# EAGLE board power (EAGLE 9.6.2)
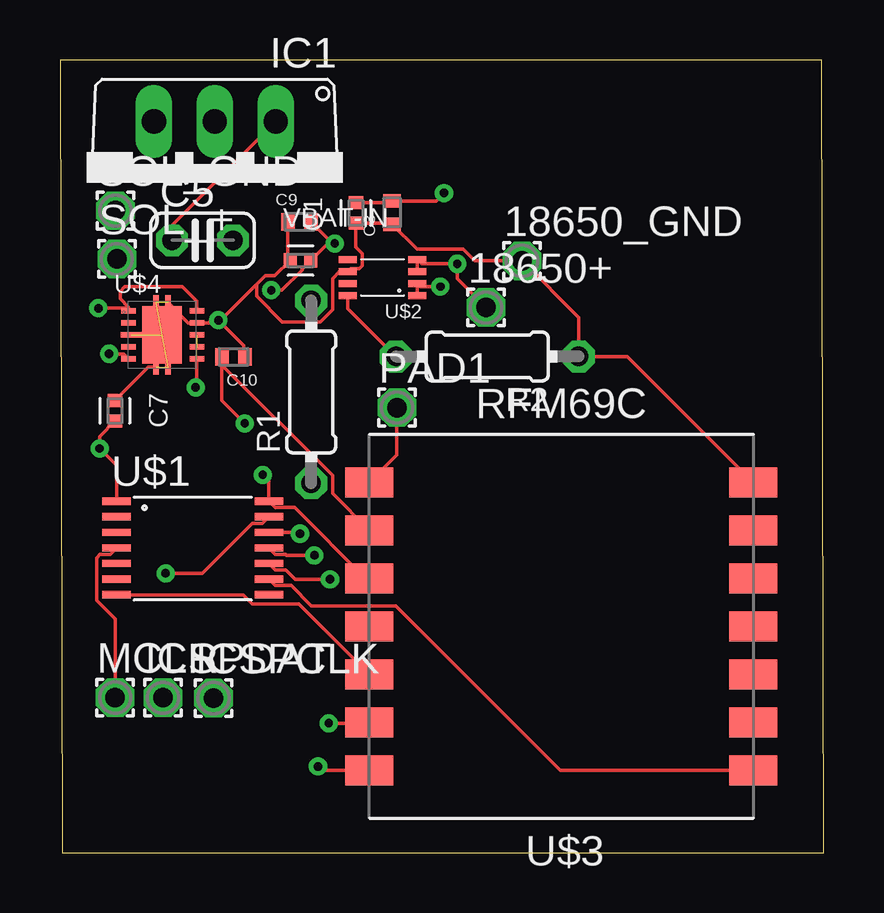
[diagram p0: board, top side]
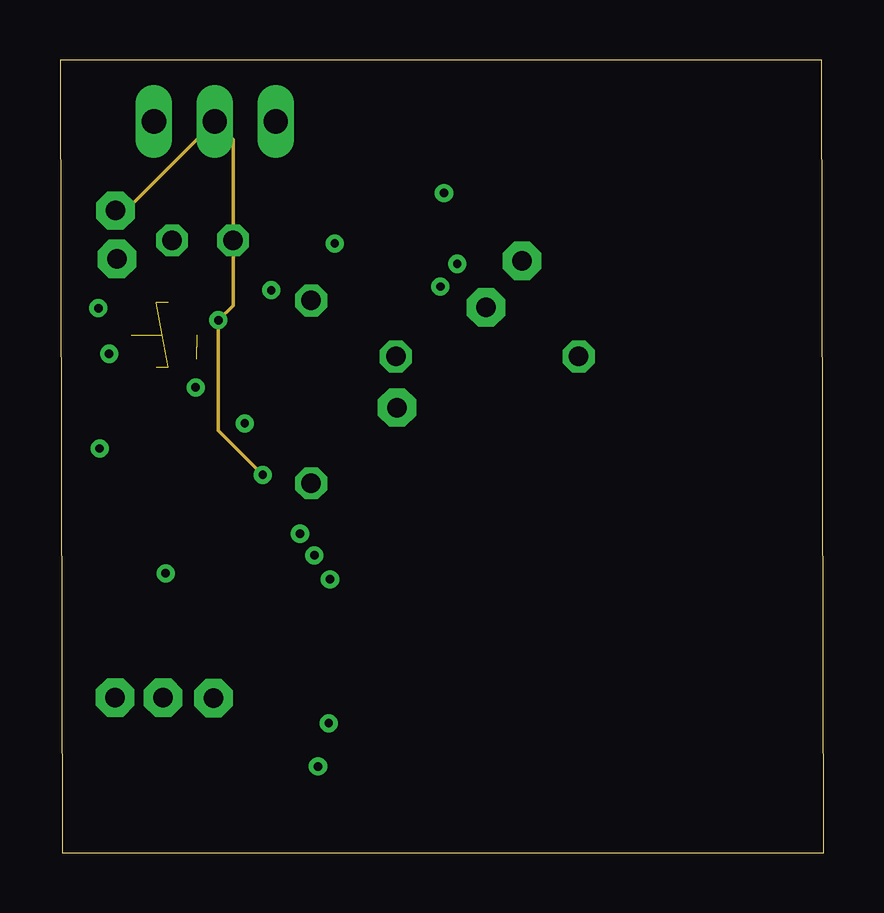
[diagram p1: board, inner layer GND]
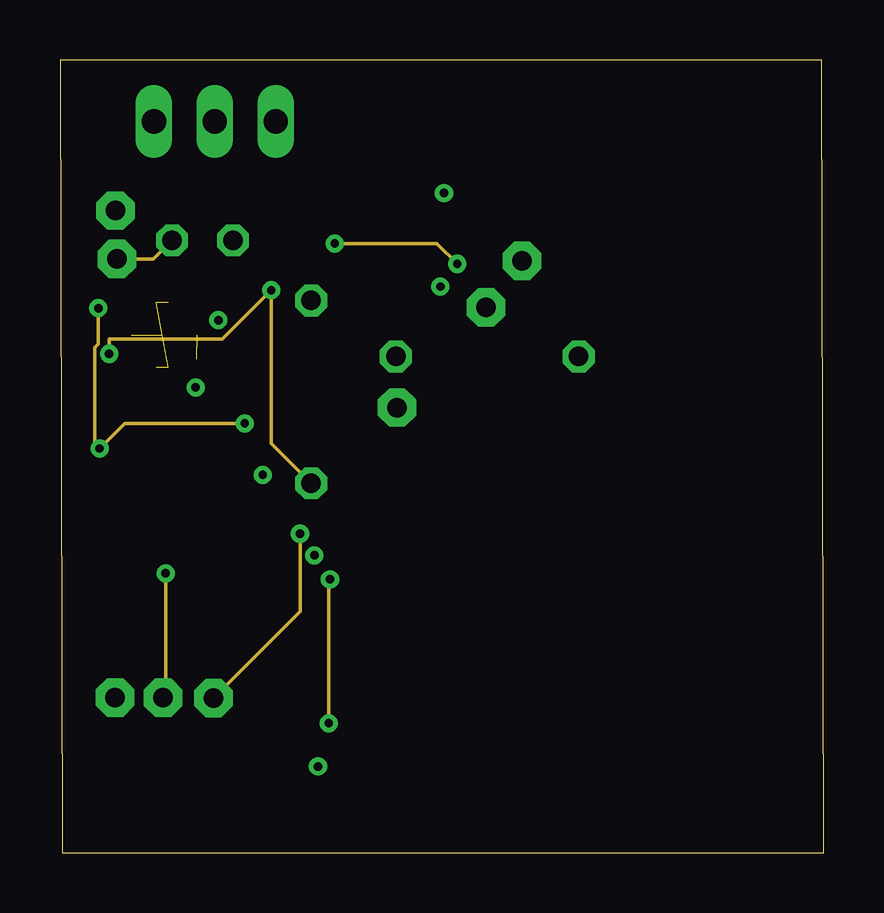
[diagram p2: board, inner layer Route3]
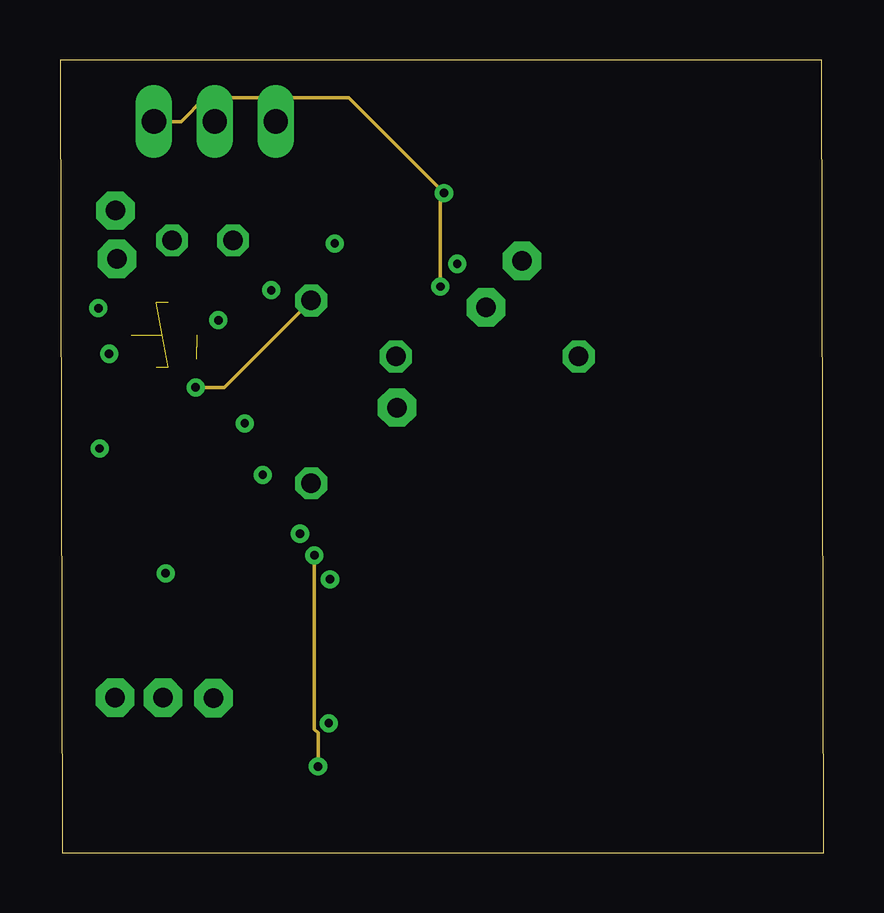
[diagram p3: board, inner layer Route4]

Size 31.83 x 33.05 mm. Coordinates in mm from the lower left corner, seen from the top.
Outline: 0.1,0 31.83,0 31.73,33.05 0,33.05 0.1,0
Copper layers (1*2*3*4): Top 0.035mm / dielectric 1.5mm / GND 0.035mm / dielectric 0.15mm / Route3 0.035mm / dielectric 0.2mm / Route4 0.035mm
Design rules "default *": minimum track width 6mil, minimum drill 0.35mm, track to track 6mil, track to pad 6mil, pad to pad 6mil, via to via 6mil, smd to smd 6mil, copper to edge 40mil, drill to drill 6mil, minimum pad ring 10mil, minimum via ring 8mil, stop-mask expansion 4mil, vias tented up to drill 0mil, thermal gap 10mil

## Footprints (pad centres in the part's own frame; a part is rotated, then mirrored left to right if it is on the bottom)
1,6/0,8 = drill 0.813 pad 1.6 octagon: 1 0,0
CAPC1005X55N = smd 0.54 x 0.6: 1 -0.43,0; 2 0.43,0
CAPC1005X70N = smd 0.56 x 0.73: 1 -0.485,0; 2 0.485,0
C025-024X044 = drill 0.813 octagon: 1 -1.27,0; 2 1.27,0
TO220V = drill 1.016 long: 1 -2.54,-2.54; 2 0,-2.54; 3 2.54,-2.54
0204/7 = drill 0.813 octagon: 1 -3.81,0; 2 3.81,0
PIC16F(L)1615-TSSOP = smd 1.2 x 0.3: 1 -3.175,1.975; 2 -3.175,1.325; 3 -3.175,0.675; 4 -3.175,0.025; 5 -3.175,-0.625; 6 -3.175,-1.275; 7 -3.175,-1.925; 8 3.175,-1.925; 9 3.175,-1.275; 10 3.175,-0.625; 11 3.175,0.025; 12 3.175,0.675; 13 3.175,1.325; 14 3.175,1.975
MCP73831-DFN = smd 0.3 x 0.75: 1 -0.75,-1.45; 2 -0.25,-1.45; 3 0.25,-1.45; 4 0.75,-1.45; 5 0.75,1.45; 6 0.25,1.45; 7 -0.25,1.45; 8 -0.75,1.45
RFM69C = smd 2 x 1.25: 1 8,-6; 2 8,-4; 3 8,-2; 4 8,0; 5 8,2; 6 8,4; 7 8,6; 8 -8,6; 9 -8,4; 10 -8,2; 11 -8,0; 12 -8,-2; 13 -8,-4; 14 -8,-6
TPS63001-VSON = smd 0.6 x 0.24: 1 -1.4,1; 2 -1.4,0.5; 4 -1.4,-0.5; 5 -1.4,-1; 6 1.45,-1; 7 1.45,-0.5; 8 1.45,0; 9 1.45,0.5; 10 1.45,1 | smd 0.889 x 0.24: 3 -1.273,0 | smd 1.65 x 2.4: 11 0,0 | smd 0.24 x 0.6: 11@1 -0.25,1.35; 11@2 0.25,1.35; 11@3 -0.25,-1.35; 11@4 0.25,-1.35

## Placement (x,y rotation side)
18650+  [1,6/0,8]  17.75,22.73 0 top
18650_GND  [1,6/0,8]  19.25,24.68 0 top
C1  .1uf  [CAPC1005X55N]  12.33,26.68 90 top
C3  1uf  [CAPC1005X70N]  13.83,26.69 90 top
C5  .33uf  [C025-024X044]  5.94,25.53 0 top
C7  .1uf  [CAPC1005X55N]  2.29,18.42 270 top
C9  1uf  [CAPC1005X70N]  9.98,26.29 0 top
C10  1uf  [CAPC1005X70N]  7.23,20.67 180 top
IC1  7805TV  [TO220V]  6.45,27.94 180 top
ICSPCLK  [1,6/0,8]  6.39,6.44 0 top
ICSPDAT  [1,6/0,8]  4.29,6.46 0 top
MCLR  [1,6/0,8]  2.3,6.47 0 top
PAD1  [1,6/0,8]  14.04,18.56 0 top
R1  100R  [0204/7]  10.47,19.21 90 top
R2  2kR  [0204/7]  17.8,20.69 180 top
SOL_+  [1,6/0,8]  2.37,24.75 0 top
SOL_GND  [1,6/0,8]  2.31,26.77 0 top
U$1  PIC16F1615-TSSOP  [PIC16F(L)1615-TSSOP]  5.53,12.68 0 top
U$2  MCP73831  [MCP73831-DFN]  13.44,23.98 90 top
U$3  RFM69C  [RFM69C]  20.89,9.44 180 top
U$4  TPS63001-VSON  [TPS63001-VSON]  4.25,21.59 0 top
VBAT-IN  .1uf  [CAPC1005X55N]  10.02,24.69 0 top

## Library data of the parts
18650+ 18650_GND ICSPCLK ICSPDAT MCLR PAD1 SOL_+ SOL_GND = wirepad
C1 C7 VBAT-IN = EMF105B7104MVHF; AVAILABILITY: Unavailable; DESCRIPTION: 0.1µF ±20% 16V Ceramic Capacitor X7R 0402 (1005 Metric); MF: Taiyo Yuden; MP: EMF105B7104MVHF; PACKAGE: 1005 Taiyo Yuden; PRICE: None
C3 C9 C10 = UMK105CBJ105KV-F; AVAILABILITY: Unavailable; DESCRIPTION: 1µF ±10% 50V Ceramic Capacitor X5R 0402 (1005 Metric); MF: Taiyo Yuden; MP: UMK105CBJ105KV-F; PACKAGE: 1005 Taiyo Yuden; PRICE: None
C5 = rcl; SPICEPREFIX: C
IC1 = linear
R1 R2 = rcl; SPICEPREFIX: R
U$1 = PIC16F(L)1615
U$2 = MCP73831
U$3 = RFM69C
U$4 = TPS63001

## Nets
GND: 18650_GND.1 C1.1 C3.1 C5.2 C7.1 C9.1 C10.1 IC1.2 R2.1 SOL_GND.1 U$1.14 U$2.6 U$3.3 U$3.14 U$4.3 U$4.9 U$4.11 U$4.11@1 U$4.11@2 U$4.11@3 U$4.11@4 VBAT-IN.1
MISO: U$1.9 U$3.8
MOSI: U$1.7 U$3.5
N$1: C5.1 IC1.1 SOL_+.1
N$2: R1.2 U$4.6 U$4.7 U$4.8
N$4: PAD1.1 U$3.1
N$5: R2.2 U$2.8
N$12: ICSPCLK.1 U$1.12
N$13: ICSPDAT.1 U$1.13
N$14: MCLR.1 U$1.4
SCK: U$1.10 U$3.6
SS: U$1.11 U$3.7
VBAT-IN: 18650+.1 C9.2 R1.1 U$2.3 U$2.4 U$4.5 VBAT-IN.2
VIN-5V: C1.2 C3.2 IC1.3 U$2.1 U$2.2
VOUT: C7.2 C10.2 U$1.1 U$3.2 U$4.1 U$4.10

## Tracks (layer width: path | path; a pad name or v marks a point on that pad's centre or on a via)
GND  (via drill 0.35 layers 1-4)  (5 unrouted)
  Top 0.152: v6.6,22.2 6.3,22.2 6.2,22.1 6.2,22.09 U$4.9 5.35,22.09 U$4.11@2 | C9.1 9.49,24.79 VBAT-IN.1 8.96,24.06 8.55,24.06 8.19,23.7 | U$4.11@3 3.68,20.24 C7.1 | U$3.14 23.64,20.69 R2.1 21.61,22.31 18650_GND.1 17.28,24.68 16.8,25.16 14.88,25.16 C3.1 13.78,26.25 C1.1 12.33,25.24 12.59,24.98 12.59,24.48 12.46,24.35 12.11,24.35 U$2.6 11.64,24.23 11.36,23.94 11.36,22.65 10.83,22.13 9.26,22.13 8.19,23.2 8.19,23.7 | U$3.3 12.72,11.44 9.78,14.38 8.98,14.38 U$1.14 8.71,15.49 v8.45,15.75 | C10.1 7.71,20.72 7.66,20.77 7.66,21.14 v6.6,22.2 | v6.6,22.2 6.69,22.2 8.19,23.7
  GND 0.152: v8.45,15.75 6.6,17.6 v6.6,22.2 7.21,22.81 C5.2 7.21,29.72 IC1.2 2.74,26.77 SOL_GND.1
MISO
  Top 0.152: U$1.9 8.98,11.13 9.63,11.13 10.47,10.29 13.98,10.29 20.84,3.44 U$3.8
MOSI
  Top 0.152: U$1.7 7.63,10.76 8.01,10.38 9.95,10.38 U$3.5
N$1
  Top 0.152: IC1.1 4.67,26.16 C5.1
  Route3 0.152: C5.1 3.89,24.75 SOL_+.1
N$2  (via drill 0.35 layers 1-4)  (2 unrouted)
  Top 0.152: U$4.6 5.7,19.45 v5.65,19.4
  Route4 0.152: R1.2 6.84,19.4 v5.65,19.4
N$4
  Top 0.152: PAD1.1 14.04,16.59 U$3.1
N$5
  Top 0.152: R2.2 11.99,22.69 U$2.8
N$12  (via drill 0.35 layers 1-4)
  Top 0.152: U$1.12 9.95,13.36 v10,13.3
  Route3 0.152: v10,13.3 10,10.05 ICSPCLK.1
N$13  (via drill 0.35 layers 1-4)
  Top 0.152: U$1.13 8.43,13.73 8.01,13.73 5.93,11.65 v4.4,11.65
  Route3 0.152: v4.4,11.65 4.4,6.57 ICSPDAT.1
N$14
  Top 0.152: MCLR.1 2.3,9.74 1.53,10.51 1.53,12.3 1.66,12.43 2.08,12.43 U$1.4
SCK  (via drill 0.35 layers 1-4)
  Top 0.152: U$3.6 12.85,5.4 v11.2,5.4 | v11.25,11.4 9.79,11.4 9.41,11.78 8.98,11.78 U$1.10
  Route3 0.152: v11.2,5.4 11.2,11.35 v11.25,11.4
SS  (via drill 0.35 layers 1-4)
  Top 0.152: U$3.7 10.91,3.44 v10.75,3.6 | v10.6,12.4 9.43,12.4 9.4,12.43 8.98,12.43 U$1.11
  Route4 0.152: v10.75,3.6 10.75,4.99 10.59,5.15 10.59,5.65 10.6,5.66 v10.6,12.4
VBAT-IN  (via drill 0.35 layers 1-4)
  Top 0.152: U$2.3 U$2.4 15.07,24.55 v16.55,24.55 16.55,23.93 18650+.1 | v8.8,23.45 9.24,23.45 10.09,24.3 10.09,24.33 VBAT-IN.2 11.16,25.4 v11.45,25.4 11.36,25.4 C9.2 | v2.05,20.8 2.1,20.8 2.1,20.79 2.65,20.79 U$4.5
  Route3 0.152: v2.05,20.8 2.05,21.41 6.76,21.41 v8.8,23.45 8.8,17.07 R1.1 | v11.45,25.4 15.7,25.4 v16.55,24.55
VIN-5V  (via drill 0.35 layers 1-4)
  Top 0.152: U$2.1 U$2.2 15.02,23.6 v15.85,23.6 | v16,27.5 15.67,27.17 C3.2 13.77,27.11 C1.2
  GND 0.152: v16,27.5 15.85,27.35
  Route4 0.152: v15.85,23.6 15.85,27.35 v16,27.5 12.03,31.47 6.04,31.47 5.05,30.48 IC1.3
VOUT  (via drill 0.35 layers 1-4)
  Top 0.152: U$4.10 5.7,23 5.1,23.6 2.7,23.6 2.5,23.4 2.5,23.1 2.85,22.75 U$4.1 2.74,22.7 v1.6,22.7 | C7.2 1.65,17.35 v1.65,16.85 2.35,16.14 U$1.1 | U$3.2 11.36,14.97 11.36,15.72 6.7,20.38 6.7,20.67 C10.2 6.74,18.86 v7.7,17.9
  Route3 0.152: v1.6,22.7 1.6,21.21 1.44,21.05 1.44,17.06 v1.65,16.85 2.7,17.9 v7.7,17.9